# Altium PCB NEW_PCB_2022-08-03.pcbdoc
Units mil, origin at the board's own origin, x right, y up, seen from the top; angles counter-clockwise.
Board outline 4947 x 4947 mil, 2 copper layers (Top Layer, Bottom Layer); 2 components, 2 nets, 64 pads, 0 vias.
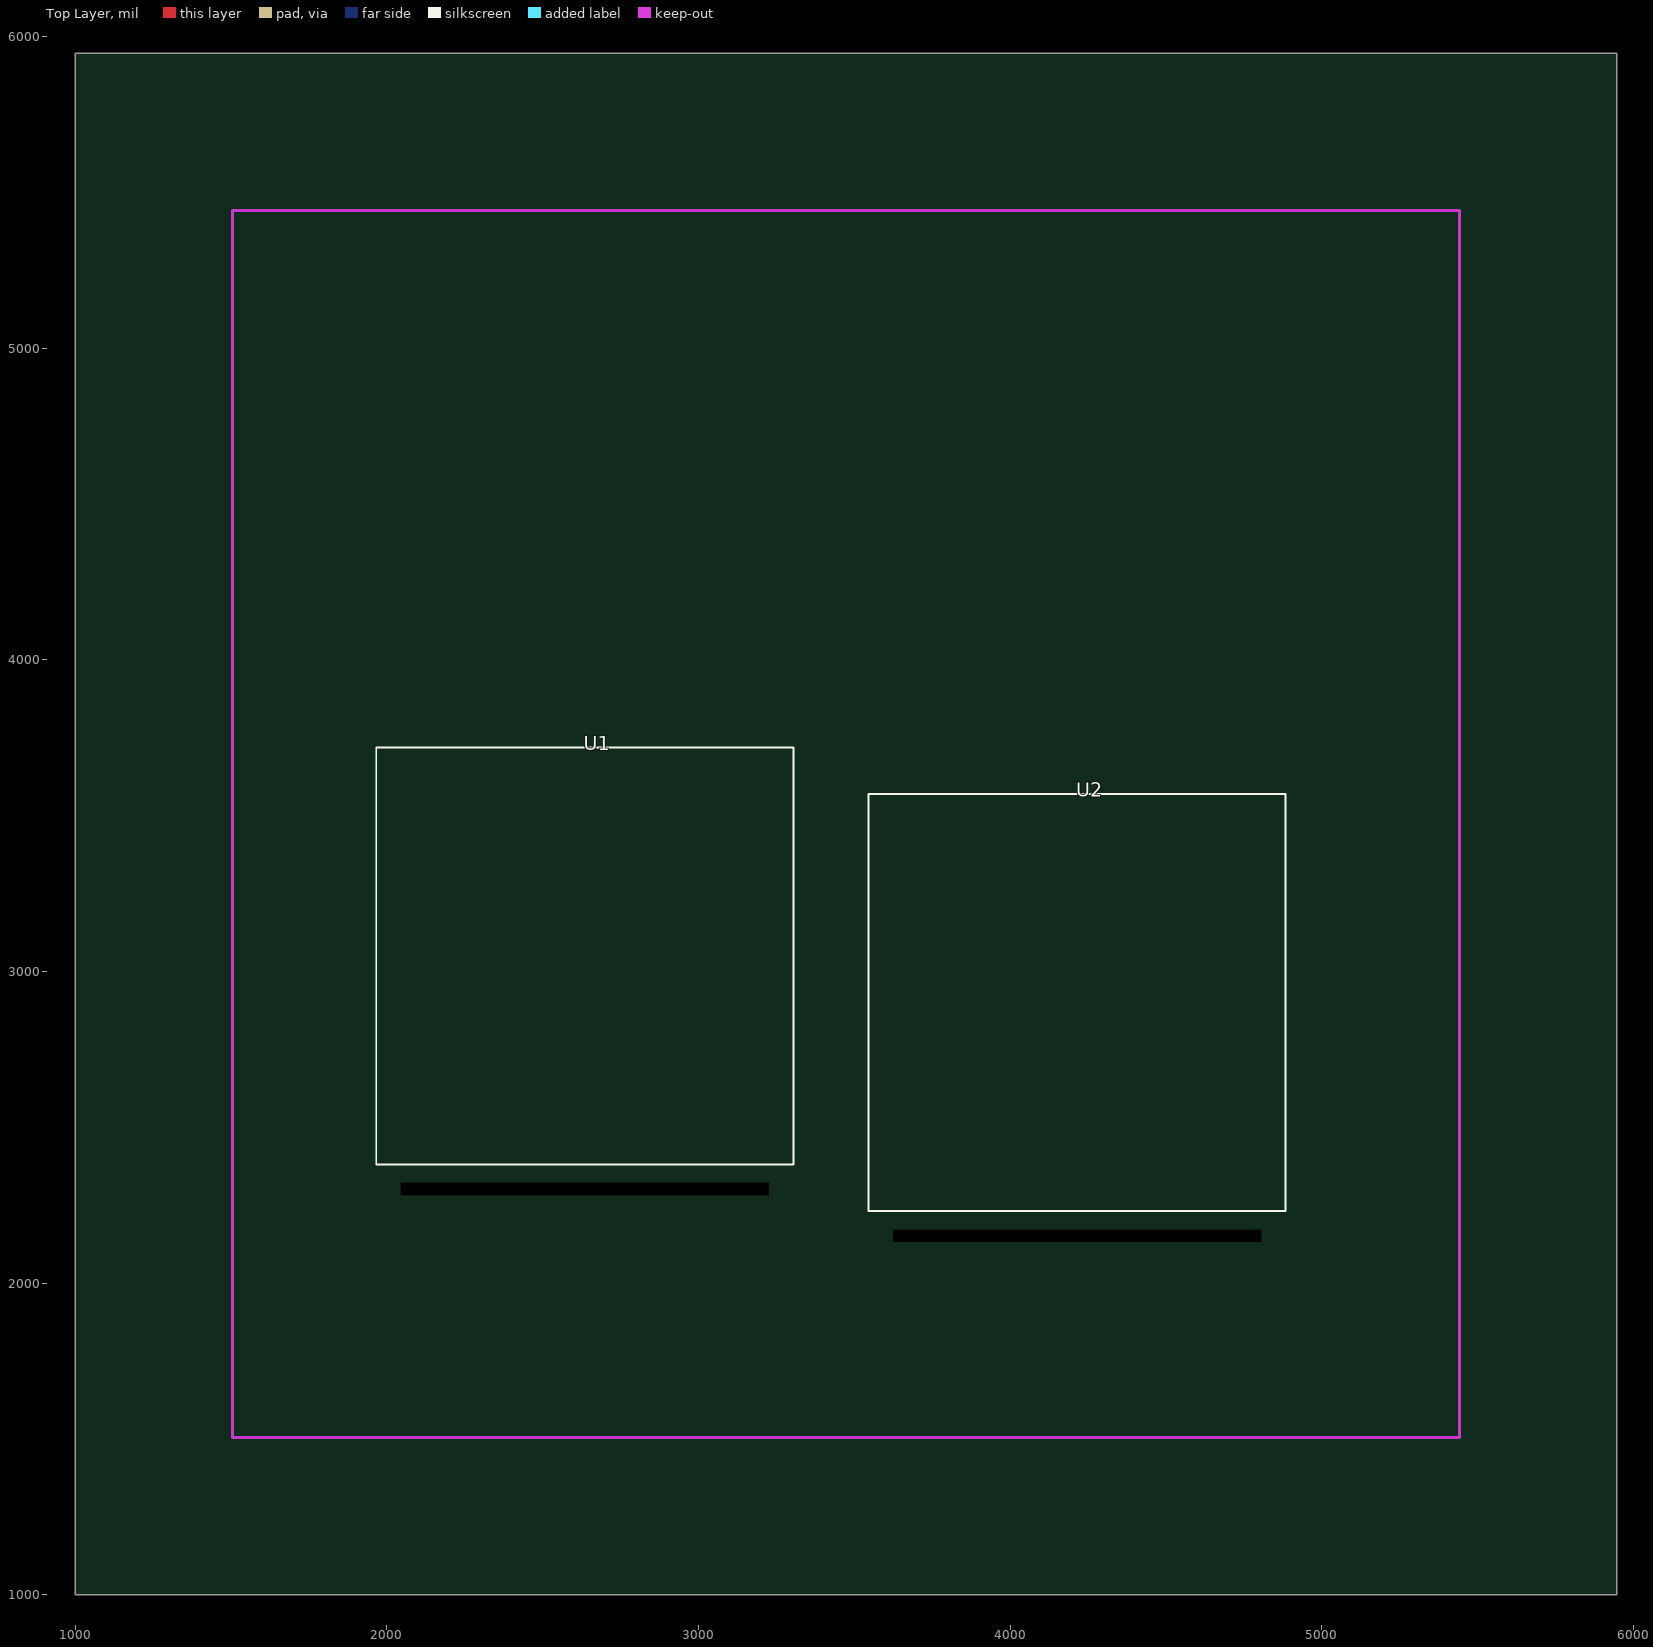
[diagram p0: Top Layer view]
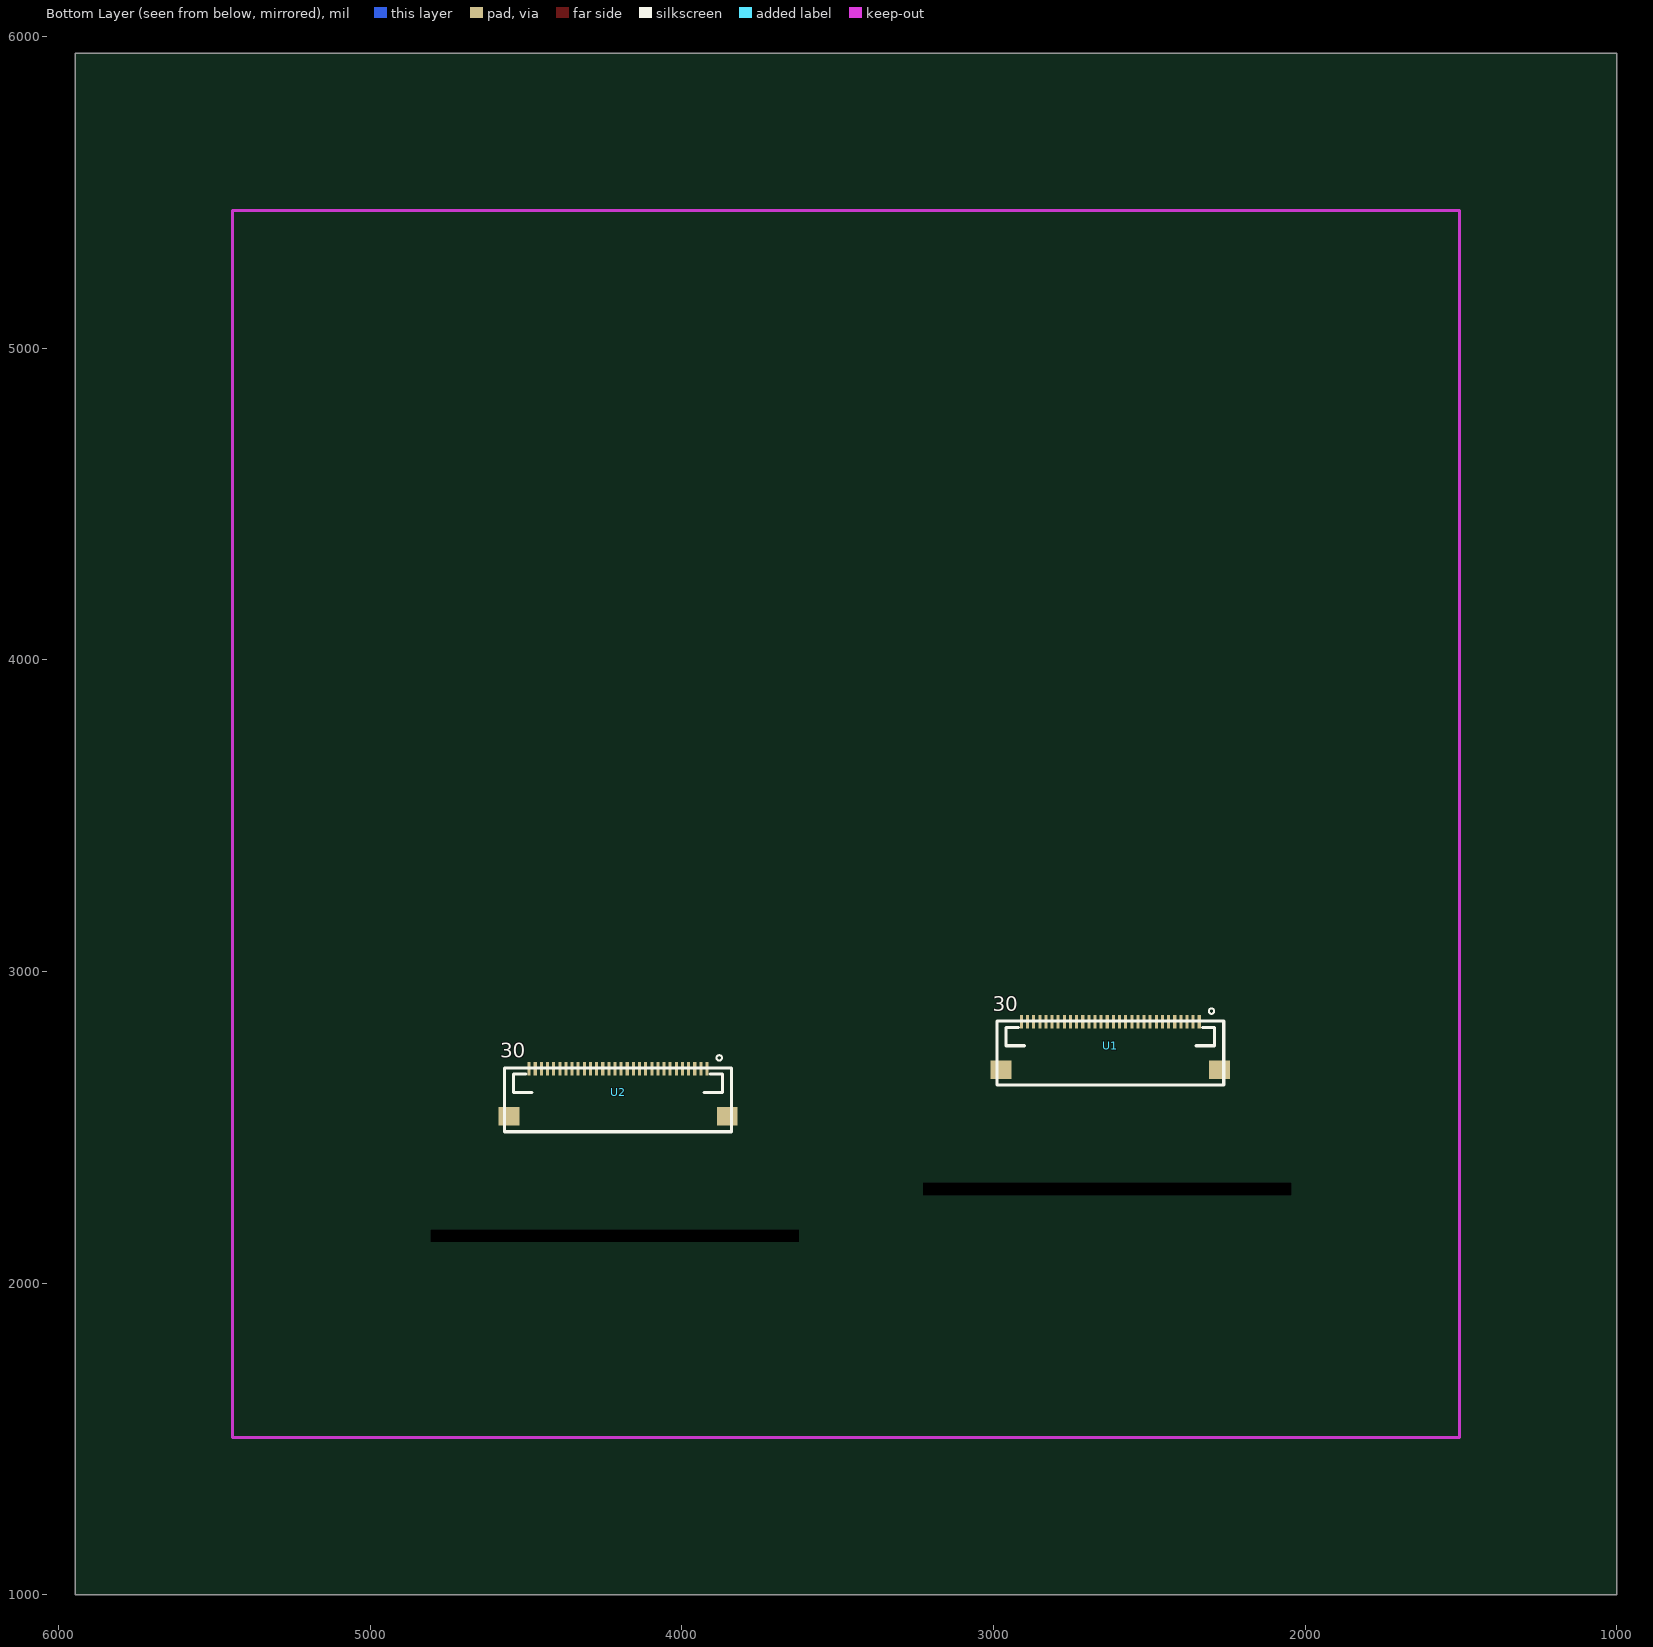
[diagram p1: Bottom Layer view, seen from below]

## Layer stack, top to bottom
Top Layer: signal copper (thickness not stored)
Dielectric: dielectric 12.6, FR-4, Dk 4.8
Bottom Layer: signal copper (thickness not stored)

## Board outline
5947,1000 1000,1000 1000,5947 5947,5947

## Components (designator, comment, footprint, x,y, rotation, side; value= is the part's Value field where it differs from the comment)
U1 "FFC-S-C0.5-4.9-30P_SSD1351" FFC-S-C0.5-4.9-30P_SSD1351 2635,3050 r0 top
U2 "FFC-S-C0.5-4.9-30P_SSD1351" FFC-S-C0.5-4.9-30P_SSD1351 4215,2900 r0 top

## Footprints (in the part's own frame and the unit in brackets; to place one, negate y for a bottom-side part, rotate by r counter-clockwise, add the part's x,y. Pads: shape width x height; smd on the part's side, far side on the other; paste and mask are expansions set on the pad)
FFC-S-C0.5-4.9-30P_SSD1351 [mm]
  rect 0.25x1.1 smd far side: CLK(-1.003,-5.367) CS(1.497,-5.367) DC(1.997,-5.367) DIN(-1.503,-5.367) GND(-7.5,-5.37) GND(-4.503,-5.367) GND(-4.002,-5.367) GND(-3.502,-5.367) GND(-3.003,-5.367) GND(-2.503,-5.367) GND(-0.502,-5.367) GND(-0.002,-5.367) GND(0.497,-5.367) GND(0.998,-5.367) GND(5.998,-5.367) GND(6.997,-5.367) IREF(2.998,-5.367) N.C(-2.002,-5.367) N.C.(-5.003,-5.367) N.C.(3.497,-5.367) N.C.(3.997,-5.367) N.C.(4.498,-5.367) N.C.(6.498,-5.367) RES(2.497,-5.367) VCC(-7.001,-5.37) VCI(5.497,-5.367) VCOMH(-6.503,-5.367) VDD(4.997,-5.367) VDDIO(-6.003,-5.367) VSL(-5.502,-5.367)
  rect 1.7x1.5 smd far side: GND(-9.152,-9.269) GND(8.649,-9.269)
  Multi-Layer board cut-out: -15,-18.5 -15,-19.5 15,-19.5 15,-18.5
  silkscreen extent -17,-17 17,17

## Nets (pads, with @x,y where several pads share a name; then routed paths per layer and width w, separated by ;. In a path a pad name is that pad's centre, name@x,y a point inside that pad or via, vN(x,y) a via of type N, cw(c..) or ccw(c..) an arc to the next point about the centre after c; other vN are vias at no path point)
S$254: 
S$256: 
pads on no net: U1.CLK U1.CS U1.DC U1.DIN U1.GND U1.IREF U1.N.C U1.N.C. U1.RES U1.VCC U1.VCI U1.VCOMH U1.VDD U1.VDDIO U1.VSL U2.CLK U2.CS U2.DC U2.DIN U2.GND U2.IREF U2.N.C U2.N.C. U2.RES U2.VCC U2.VCI U2.VCOMH U2.VDD U2.VDDIO U2.VSL

## Silkscreen, mask and mechanical layers (free items; w line width, h text height)
Document:
  lines w0.1: 3473.49,3473.49 3473.51,3473.51

## Text inside footprints (layer, text, board x,y; h text height)
U1: Bottom Overlay "30" at 3002.51,2856.65 h80
U2: Bottom Overlay "30" at 4582.51,2706.65 h80